# Altium PCB PCB1.PcbDoc
Units mil, origin at the board's own origin, x right, y up, seen from the top; angles counter-clockwise.
Board outline 1330 x 1345 mil, 2 copper layers (Top Layer, Bottom Layer); 12 components, 13 nets, 144 pads, 0 vias.
Unrouted connection lines stored in the file: 35.
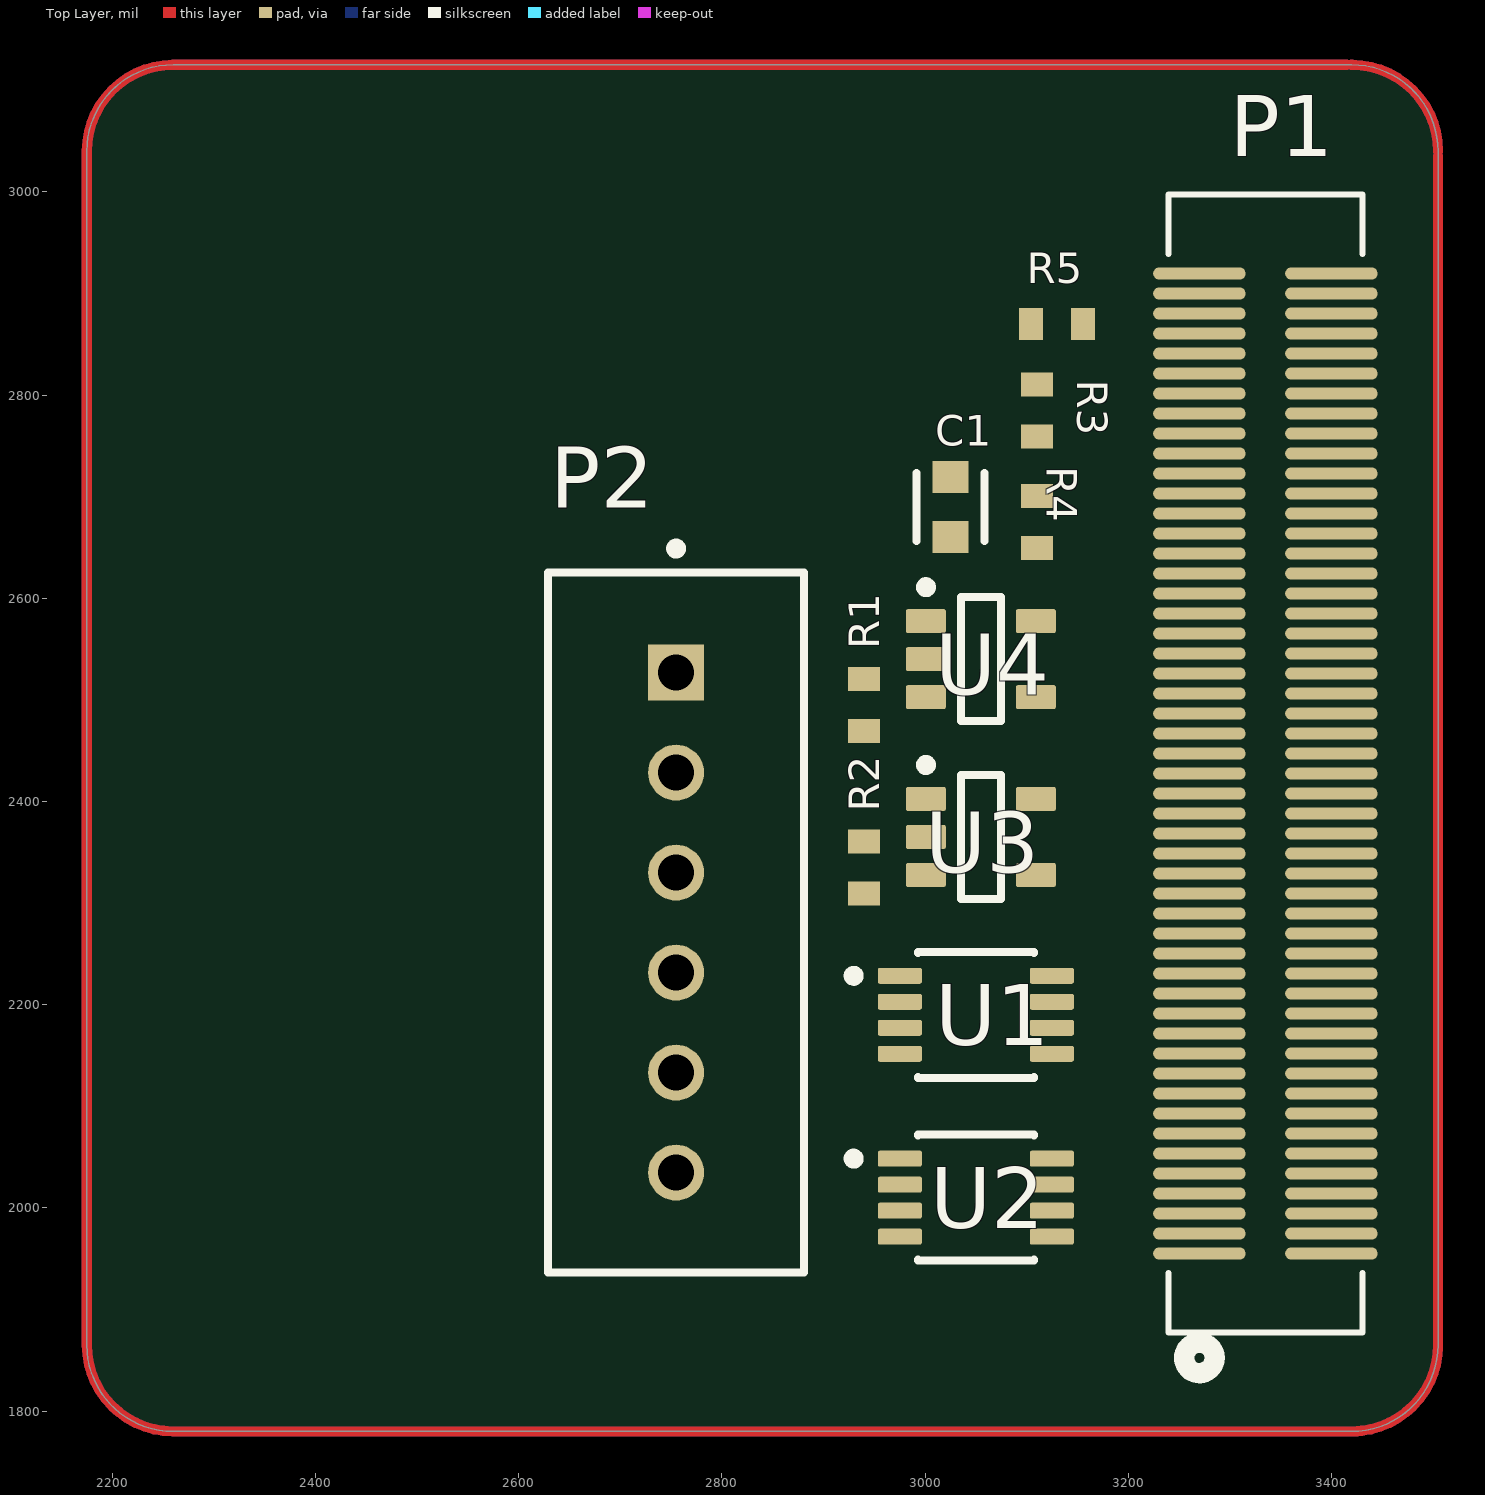
[diagram p0: Top Layer view]
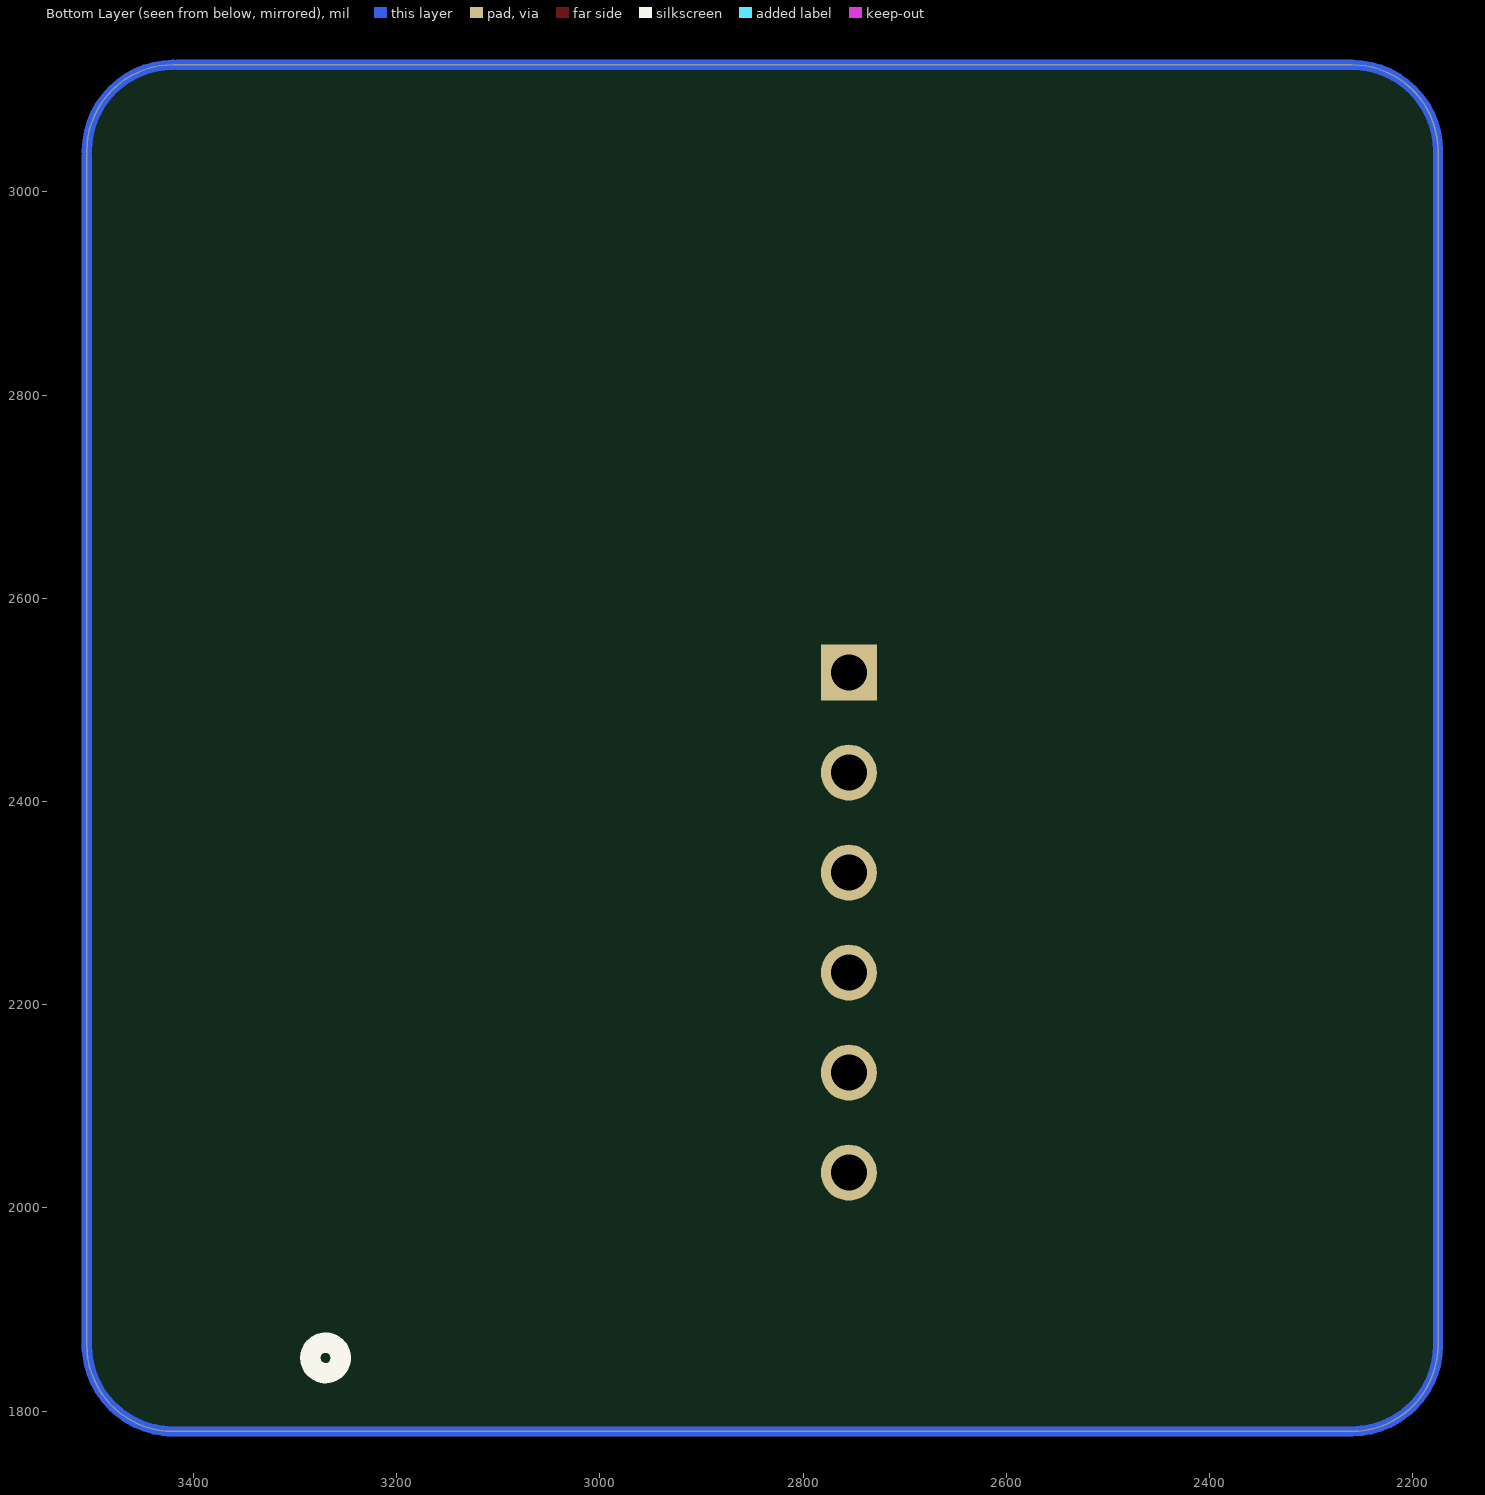
[diagram p1: Bottom Layer view, seen from below]

## Layer stack, top to bottom
Top Solder: solder mask 0.4, Solder Resist, Dk 3.5
Top Layer: signal copper 1.4
Dielectric 1: dielectric 12.6, FR-4, Dk 4.8
Bottom Layer: signal copper 1.4
Bottom Solder: solder mask 0.4, Solder Resist, Dk 3.5

## Board outline
2175,1865 2175,3040 cw(c2260,3040) 2260,3125 3420,3125 cw(c3420,3040) 3505,3040 3505,1865 cw(c3420,1865) 3420,1780 3425,1780 2260,1780 cw(c2260,1865)

## Design rules (kind name [scope] priority, off if disabled: settings)
Clearance [All] p1: gap=10 ignorepadtopadclearanceinfootprint=FALSE
PolygonConnect [All] p1: connectstyle=Relief reliefconductorwidth=10 reliefentries=4 polygonreliefangle="90 Angle" airgapwidth=10
RoutingVias [All] p1: holewidth=28 width=50 viastyle="Through Hole" minholewidth=28 minwidth=50 maxholewidth=28 maxwidth=50
SolderMaskExpansion [All] p1: expansion=4 istentingtop=FALSE
Width [All] p1: maxlimit=10 minlimit=10 preferedwidth=10
30 further rules are at their usual default settings.

## Components (designator, comment, footprint, x,y, rotation, side; value= is the part's Value field where it differs from the comment)
C1 "100uF" FP-CC0603-DA-MFG 3025,2690 r270 top value="10 nF"
P1 "AXK6S00547YG" CONN_AXK600347YG_PAN 3335.04,2437.28 r90 top
P2 "B06B-XASK-1(LF)(SN)" FP-B06B-XASK-1_LF_SN-MFG 2755,2280.79 r90 top
R1 "4.7k" RESC1608X55X25LL10T15 2940,2495 r270 top
R2 "4.7k" RESC1608X55X25LL10T15 2940,2335 r90 top
R3 "4.7k" RESC1608X55X25LL10T15 3110,2785 r270 top
R4 "4.7k" RESC1608X55X25LL10T15 3110,2675 r90 top
R5 "4.7k" RESC1608X55X25LL10T15 3130,2870 r180 top
U1 "LSF0102DCTR" FP-DCT0008A-MFG 3050,2190 r0 top
U2 "LSF0102DCTR" FP-DCT0008A-MFG 3050,2010 r0 top
U3 "LP5951MFX-1.8/NOPB" DBV0005A_N 3055,2365 r0 top
U4 "LP5951MFX-3.3/NOPB" DBV0005A_N 3055,2540 r0 top

## Footprints (in the part's own frame and the unit in brackets; to place one, negate y for a bottom-side part, rotate by r counter-clockwise, add the part's x,y. Pads: shape width x height; smd on the part's side, far side on the other; paste and mask are expansions set on the pad)
CONN_AXK600347YG_PAN [mil]
  oval 12x91 smd paste+0 mask+0: 1(-482.28,64.96) 2(-482.28,-64.96) 3(-462.6,64.96) 4(-462.6,-64.96) 5(-442.91,64.96) 6(-442.91,-64.96) 7(-423.23,64.96) 8(-423.23,-64.96) 9(-403.54,64.96) 10(-403.54,-64.96) 11(-383.86,64.96) 12(-383.86,-64.96) 13(-364.17,64.96) 14(-364.17,-64.96) 15(-344.49,64.96) 16(-344.49,-64.96) 17(-324.8,64.96) 18(-324.8,-64.96) 19(-305.12,64.96) 20(-305.12,-64.96) 21(-285.43,64.96) 22(-285.43,-64.96) 23(-265.75,64.96) 24(-265.75,-64.96) 25(-246.06,64.96) 26(-246.06,-64.96) 27(-226.38,64.96) 28(-226.38,-64.96) 29(-206.69,64.96) 30(-206.69,-64.96) 31(-187.01,64.96) 32(-187.01,-64.96) 33(-167.32,64.96) 34(-167.32,-64.96) 35(-147.64,64.96) 36(-147.64,-64.96) 37(-127.95,64.96) 38(-127.95,-64.96) 39(-108.27,64.96) 40(-108.27,-64.96) 41(-88.58,64.96) 42(-88.58,-64.96) 43(-68.9,64.96) 44(-68.9,-64.96) 45(-49.21,64.96) 46(-49.21,-64.96) 47(-29.53,64.96) 48(-29.53,-64.96) 49(-9.84,64.96) 50(-9.84,-64.96) 51(9.84,64.96) 52(9.84,-64.96) 53(29.53,64.96) 54(29.53,-64.96) 55(49.21,64.96) 56(49.21,-64.96) 57(68.9,64.96) 58(68.9,-64.96) 59(88.58,64.96) 60(88.58,-64.96) 61(108.27,64.96) 62(108.27,-64.96) 63(127.95,64.96) 64(127.95,-64.96) 65(147.64,64.96) 66(147.64,-64.96) 67(167.32,64.96) 68(167.32,-64.96) 69(187.01,64.96) 70(187.01,-64.96) 71(206.69,64.96) 72(206.69,-64.96) 73(226.38,64.96) 74(226.38,-64.96) 75(246.06,64.96) 76(246.06,-64.96) 77(265.75,64.96) 78(265.75,-64.96) 79(285.43,64.96) 80(285.43,-64.96) 81(305.12,64.96) 82(305.12,-64.96) 83(324.8,64.96) 84(324.8,-64.96) 85(344.49,64.96) 86(344.49,-64.96) 87(364.17,64.96) 88(364.17,-64.96) 89(383.86,64.96) 90(383.86,-64.96) 91(403.54,64.96) 92(403.54,-64.96) 93(423.23,64.96) 94(423.23,-64.96) 95(442.91,64.96) 96(442.91,-64.96) 97(462.6,64.96) 98(462.6,-64.96) 99(482.28,64.96) 100(482.28,-64.96)
  silkscreen extent -600,-96 560,96
DBV0005A_N [mm] "SOT23, 5-Leads, Body 3.05x1.75mm, Pitch 0.95mm, IPC Medium Density"
  rrect17% 1x0.6 smd: 1(-1.375,0.95) 2(-1.375,0) 3(-1.375,-0.95) 4(1.375,-0.95) 5(1.375,0.95)
  silkscreen extent -1.5,-1.55 0.5,1.92, body extent -1.42,-1.46 1.42,1.46, height 1.08
FP-B06B-XASK-1_LF_SN-MFG [mm]
  rect 1.4x1.4 hole 0.9 paste-2539.97 mask+0: 1(6.25,0)
  round 1.4 hole 0.9 paste-2539.97 mask+0: 2(3.75,0) 3(1.25,0) 4(-1.25,0) 5(-3.75,0) 6(-6.25,0)
  silkscreen extent -8.75,-3.2 9.47,3.2, body extent -8.85,-3.3 8.85,3.3, height 0.25
FP-CC0603-DA-MFG [mm]
  rect 0.8x0.9 smd paste+0 mask+0: 1(-0.75,0) 2(0.75,0)
  silkscreen extent -0.85,-0.85 0.85,0.85, body extent -1.35,-0.75 1.35,0.75, height 0.25
FP-DCT0008A-MFG [mm]
  rrect25% 1.1x0.4 smd paste+0 mask+0: 1(-1.9,0.975) 2(-1.9,0.325) 3(-1.9,-0.325) 4(-1.9,-0.975) 5(1.9,-0.975) 6(1.9,-0.325) 7(1.9,0.325) 8(1.9,0.975)
  silkscreen extent -3.18,-1.58 1.45,1.58, body extent -2.55,-1.83 2.55,1.83, height 0.25
RESC1608X55X25LL10T15 [mm] "Chip Resistor, 2-Leads, Body 1.60x0.80mm, IPC High Density"
  rect 0.6x0.8 smd: 1(-0.65,0) 2(0.65,0)
  body extent -0.85,-0.45 0.85,0.45, height 0.55

## Part data
C1: library part CMP-2100-03600-2, "CAP CER 10000PF 50V X7R 0603", Capacitance="10 nF", Manufacturer=YAGEO, Manufacturer Part Number=CC0603KRX7R9BB103, Package=CC0603-DA, Temperature="-55°C to +125°C", Temperature Characteristic=X7R, Temperature Coefficient=15%, Temperature Range High=+125°C, Temperature Range Low=-55°C, Tolerance=0.1, Voltage="50 V", Automotive=No, Category=Cap, ComponentLink2Description=Datasheet, ComponentLink2URL=http://www.yageo.com/documents/recent/UPY-GPHC_X7R_6.3V-to-50V_18.pdf, Device Class L1="Passive Components", Device Class L2=Capacitors, Device Class L3="Ceramic Capacitors", Digikey Description="CAP CER 10000PF 50V X7R 0603", Footprint Url=http://www.yageo.com/exep/pages/download/literatures/UPY-C_GEN_24.pdf, Height=0.9mm, Lead Free=Yes, Material=Ceramic, Mouser Description="Multilayer Ceramic Capacitor, CC Series, 0.01 - F, - 10%, X7R, 50 V, 0603 [1608 Metric]", Octopart=https://octopart.com/cc0603krx7r9bb103-yageo-192938, RoHS=TRUE, Voltage Rating="50 V"
P1: "100 Pin Connector"
P2: library part CMP-17439-000268-1, "CONN HEADER VERT 6POS 2.5MM", Color=Beige, Contact Resistance=20mR, Current Rating=3A, Flammability Rating="UL94 V-0", Insulation Color=Natural, Insulation Resistance=1GR, Max Operating Temperature=85°C, Max Voltage Rating (AC)=250V, Min Operating Temperature=-25°C, Connector Type=Header, Contact Finish - Mating=TIN, Contact Material="Copper Alloy", Contact Plating=Tin, Contact Shape=Circular, Contact Type="Male Pin", Depth=6.4mm, Fastening Type=Ramp, Gender=Male, Height=8.8mm, Housing Color=Beige, Housing Material=Polyamide, Insulation Material=Nylon, Lead Free="Lead Free", Lead Length=3.4mm, Length=17.5mm, Mated Stacking Heights=11.3mm, Material=Nylon, Max Current Rating=3A, Mount="Through Hole", Number of Contacts=6, Number of Pins=6, Number of Poles=6, Number of Positions=6, Number of Rows=1, Orientation=Straight, Packaging=Bulk, Pitch=2.5mm, REACH SVHC="No SVHC", Series=XA, Termination=Solder, Voltage Rating=250V, Voltage Rating (AC)=250V, Voltage Rating (DC)=250V, Width=6.4mm, Wire/Cable Gauge=20AWG
R1 R2 R3 R4 R5: library part CMP-2000-06942-1, "Chip Resistor, 4.7 KOhm, +/- 1%, 0.1 W, -55 to 155 degC, 0603 (1608 Metric), RoHS, Tape and Reel", Case Code - in=0603, Case Code - mm=1608, Manufacturer=Yageo, Operating Temperature Range=-55Cto+155C, Package Description="2-Pin Surface Mount Device, Body 1.6 x 0.8 mm", Power Rating=100mW, Resistance=4.7kOhms, Temperature Coefficient=100PPM/C, Tolerance=1%, Voltage Rating=50V, Datasheet URL=http://www.yageo.com/documents/recent/PYu-RC_Group_51_RoHS_L_7.pdf, Datasheet Version="Rev. 7, 05/2017", Manufacturer URL=http://www.yageo.com/, Mounting Technology=SurfaceMount, Package Reference=0603, Packaging=Reel, Product=ThickFilmResistorsGeneralPurpose, Series=RC, Termination Style=SMD/SMT
U1 U2: library part CMP-04899-000040-1, "IC TRNSLTR BIDIRECTIONAL SM8", Case/Package=SSOP, High Level Output Current=64mA, Max Operating Temperature=125°C, Min Operating Temperature=-40°C, Package Quantity=3000, Channel Type=Bidirectional, Data Rate=200Mbps, Lead Free="Lead Free", Logic Function=Translator, Low Level Output Current=64mA, Mount="Surface Mount", Number of Bits=2, Number of Circuits=1, Number of Pins=8, Packaging="Tape and Reel", Propagation Delay=1.3ns, Radiation Hardening=No, RoHS Compliant=Yes, Weight=0.000705oz
U3: library part CMP-0062-02048-3, "Micropower, 150mA Low-Dropout CMOS Voltage Regulator, 5-pin SOT-23, Pb-Free", Manufacturer="Texas Instruments", PackageTopMarking=LKBB*XTT, PowerWise=N, ComponentLink1Description="Datasheet URL", ComponentLink1URL=http://www.ti.com/general/docs/lit/getliterature.tsp?genericPartNumber=LP5951&fileType=pdf, CompType="LDO IC", PackageDescription="Molded SOT-23, .115 x .063 x .040 in Body, 5 Lead, .0375 in Pitch", PackageReference=DBV0005A, PinCount=5, RoHS=Y
U4: library part CMP-0062-02108-3, "Micropower, 150mA Low-Dropout CMOS Voltage Regulator, 5-pin SOT-23, Pb-Free", Manufacturer="Texas Instruments", PackageTopMarking=LKHB*XTT, PowerWise=N, ComponentLink1Description="Datasheet URL", ComponentLink1URL=http://www.ti.com/general/docs/lit/getliterature.tsp?genericPartNumber=LP5951&fileType=pdf, CompType="LDO IC", PackageDescription="Molded SOT-23, .115 x .063 x .040 in Body, 5 Lead, .0375 in Pitch", PackageReference=DBV0005A, PinCount=5, RoHS=Y

## Nets (pads, with @x,y where several pads share a name; then routed paths per layer and width w, separated by ;. In a path a pad name is that pad's centre, name@x,y a point inside that pad or via, vN(x,y) a via of type N, cw(c..) or ccw(c..) an arc to the next point about the centre after c; other vN are vias at no path point)
+1V8: R1.2 R2.2 U1.2 U2.2 U3.5
+3V3: R3.2 R4.2 R5.2 U4.5
+5V: P1.1 P2.1 U3.1 U3.3 U4.1 U4.3
EN/VREFB: C1.1 R3.1 U1.7 U1.8 U2.7 U2.8
GND: C1.2 P1.9 P2.2 U1.1 U2.1 U3.2 U4.2
NetP2_3: P2.3 R1.1 U1.3
NetP2_4: P2.4 R2.1 U1.4
NetP2_5: P2.5 U2.3
NetP2_6: P2.6 U2.4
"Upcore RX": P1.18 U2.5
"Upcore SCL": P1.75 R5.1 U1.5
"Upcore SDA": P1.73 R4.1 U1.6
"Upcore TX": P1.16 U2.6
pads on no net: P1.2 P1.3 P1.4 P1.5 P1.6 P1.7 P1.8 P1.10 P1.11 P1.12 P1.13 P1.14 P1.15 P1.17 P1.19 P1.20 P1.21 P1.22 P1.23 P1.24 P1.25 P1.26 P1.27 P1.28 P1.29 P1.30 P1.31 P1.32 P1.33 P1.34 P1.35 P1.36 P1.37 P1.38 P1.39 P1.40 P1.41 P1.42 P1.43 P1.44 P1.45 P1.46 P1.47 P1.48 P1.49 P1.50 P1.51 P1.52 P1.53 P1.54 P1.55 P1.56 P1.57 P1.58 P1.59 P1.60 P1.61 P1.62 P1.63 P1.64 P1.65 P1.66 P1.67 P1.68 P1.69 P1.70 P1.71 P1.72 P1.74 P1.76 P1.77 P1.78 P1.79 P1.80 P1.81 P1.82 P1.83 P1.84 P1.85 P1.86 P1.87 P1.88 P1.89 P1.90 P1.91 P1.92 P1.93 P1.94 P1.95 P1.96 P1.97 P1.98 P1.99 P1.100 U3.4 U4.4

## Other copper
Multi-Layer:
  lines w10: 3415,3125 2260,3125 ccw(c2260,3040) 2175,3040 2175,1865 ccw(c2260,1865) 2260,1780 3425,1780 ; 3420,1780 ccw(c3420,1865) 3505,1865 ; 3420,3125 cw(c3420,3040) 3505,3040 ; 3505,1860 3505,3035